# EAGLE board ps2x2 (EAGLE 7.5.0)
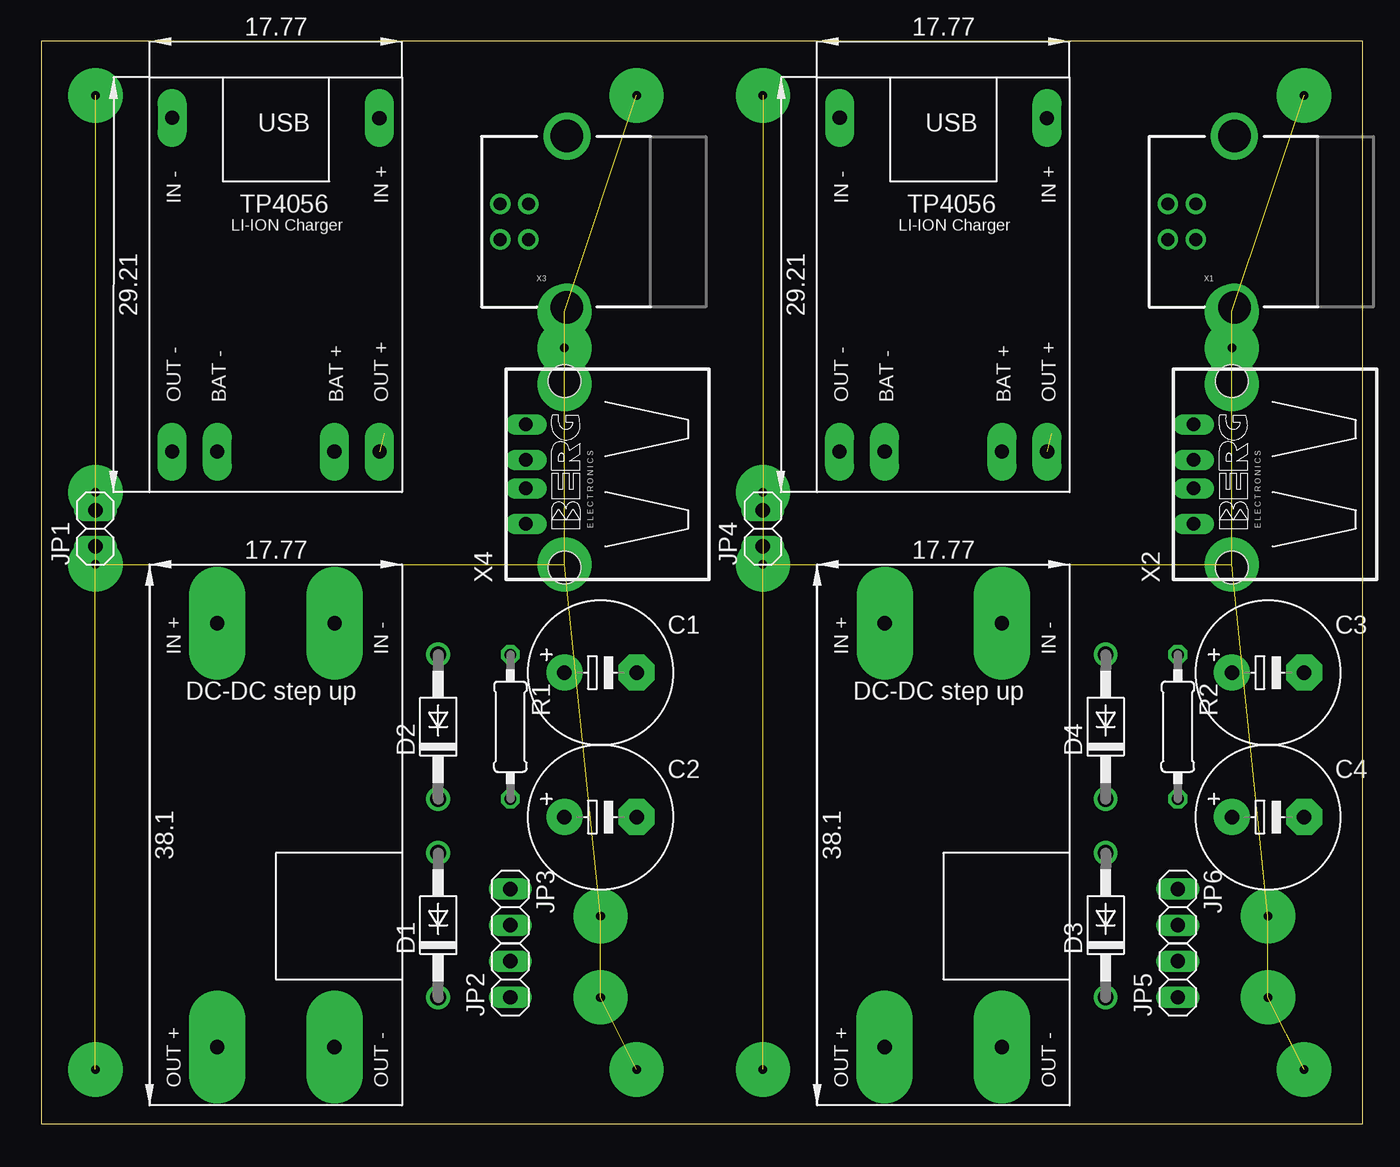
[diagram p0: board, top side]
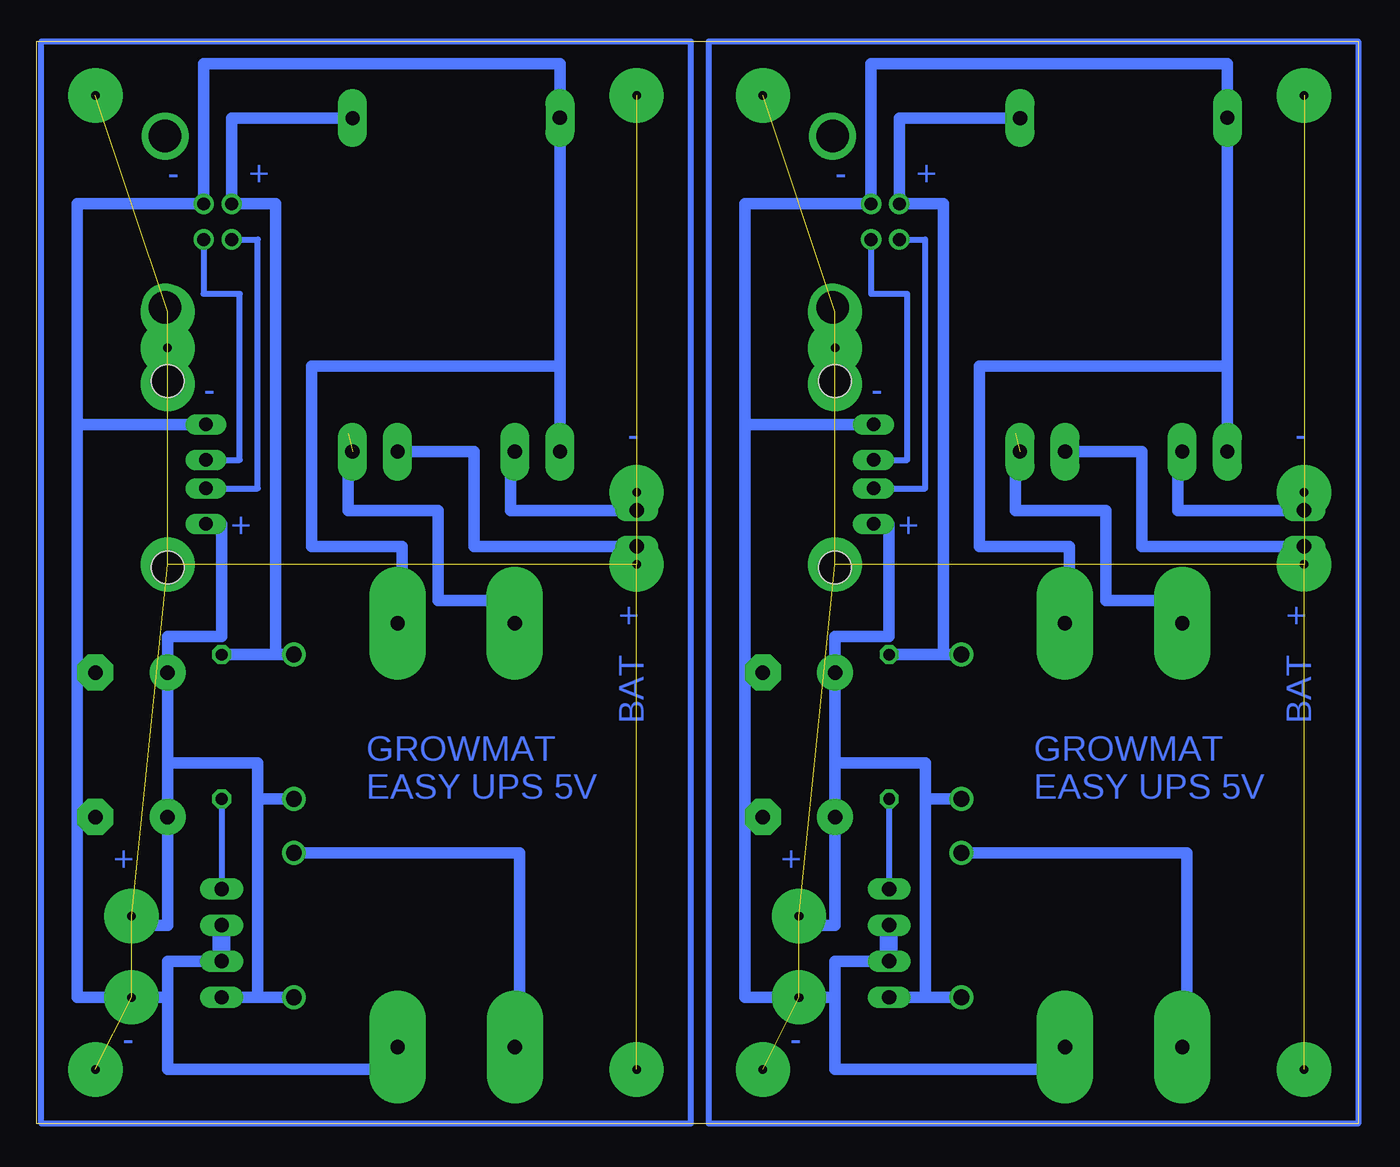
[diagram p1: board, bottom side, seen from below]

Size 93.02 x 76.19 mm. Coordinates in mm from the lower left corner, seen from the top.
Outline: 0,0 93.02,0 93.02,76.19 0,76.19 0,0
Copper layers (1*16): Top 0.035mm / dielectric 1.5mm / Bottom 0.035mm
Design rules "default": minimum track width 10mil, minimum drill 24mil, track to track 8mil, track to pad 8mil, pad to pad 8mil, via to via 8mil, smd to smd 8mil, copper to edge 40mil, drill to drill 8mil, minimum pad ring 10mil, minimum via ring 8mil, stop-mask expansion 4mil, vias tented up to drill 0mil, thermal gap 10mil

## Footprints (pad centres in the part's own frame; a part is rotated, then mirrored left to right if it is on the bottom)
E5-10,5 = drill 1.016 pad 2.54: + -2.54,0 | drill 1.016 pad 2.54 octagon: - 2.54,0
DO41-10 = drill 1.118: A 5.08,0; C -5.08,0
1X02 = drill 1.016 long: 1 -1.27,0; 2 1.27,0
0207/10 = drill 0.813 octagon: 1 -5.08,0; 2 5.08,0
TP4056 = drill 1 pad 2.032 long: BAT+ 4.128,-13.652; BAT- -4.128,-13.652; IN+ 7.295,9.835; IN- -7.295,9.85; OUT+ 7.303,-13.652; OUT- -7.303,-13.652
DC-DC_STEPUP = drill 1 pad 3.962 long: IN+ -4.12,8.565; IN- 4.135,8.565; OUT+ -4.128,-21.273; OUT- 4.128,-21.273
USB-B-PTH = drill 0.914: D+ 0,1.25; D- 1.981,1.25; GND 0,-1.25; VBUS 1.981,-1.25 | drill 2.286: P$1 -2.718,-6.02; P$2 -2.718,6.02
PN87520 = drill 0.95 long: 1 -3.5,2.71; 2 -1,2.71; 3 1,2.71; 4 3.5,2.71 | hole 2.3: -6.57,0; 6.57,0

## Placement (x,y rotation side)
C1  [E5-10,5]  39.37,31.75 0 top
C2  [E5-10,5]  39.37,21.59 0 top
C3  [E5-10,5]  86.36,31.75 0 top
C4  [E5-10,5]  86.36,21.59 0 top
D1  1N4004  [DO41-10]  27.94,13.97 90 top
D2  1N4004  [DO41-10]  27.94,27.94 90 top
D3  1N4004  [DO41-10]  74.93,13.97 90 top
D4  1N4004  [DO41-10]  74.93,27.94 90 top
JP1  [1X02]  3.81,41.91 90 top
JP2  [1X02]  33.02,10.16 90 top
JP3  [1X02]  33.02,15.24 270 top
JP4  [1X02]  50.8,41.91 90 top
JP5  [1X02]  80.01,10.16 90 top
JP6  [1X02]  80.01,15.24 270 top
R1  [0207/10]  33.02,27.94 270 top
R2  [0207/10]  80.01,27.94 270 top
U$1  TP4056  [TP4056]  16.51,60.96 0 top
U$2  TP4056  [TP4056]  63.5,60.96 0 top
U$3  DC-DC_STEPUP  [DC-DC_STEPUP]  16.51,26.67 0 top
U$4  DC-DC_STEPUP  [DC-DC_STEPUP]  63.5,26.67 0 top
X1  USBPTH  [USB-B-PTH]  81.28,63.5 180 top
X2  [PN87520]  83.82,45.72 90 top
X3  USBPTH  [USB-B-PTH]  34.29,63.5 180 top
X4  [PN87520]  36.83,45.72 90 top

## Library data of the parts
C1-C4 R1 R2 = resistor
D1-D4 = diode
JP1-JP6 = pinhead
U$1 U$2 = TP4056 charging module with protection
U$3 U$4 = DC-DC step up 2
X1 X3 = usb
X2 X4 = con-berg; OC_FARNELL: unknown; OC_NEWARK: unknown

## Nets
N$1: D2.A R1.1 U$1.IN+ X3.VBUS
N$2: U$1.OUT+ U$3.IN+
N$3: C1.- C2.- JP2.2 JP3.2 U$1.IN- U$1.OUT- U$3.IN- U$3.OUT- X3.GND X4.4
N$6: JP1.1 U$1.BAT+
N$7: JP1.2 U$1.BAT-
N$8: D1.A U$3.OUT+
N$9: C1.+ C2.+ D1.C D2.C JP2.1 X4.1
N$10: D4.A R2.1 U$2.IN+ X1.VBUS
N$11: U$2.OUT+ U$4.IN+
N$12: JP3.1 R1.2
N$13: X3.D+ X4.3
N$14: X3.D- X4.2
N$15: JP4.1 U$2.BAT+
N$16: JP4.2 U$2.BAT-
N$17: D3.A U$4.OUT+
N$18: C3.+ C4.+ D3.C D4.C JP5.1 X2.1
N$19: JP6.1 R2.2
N$20: X1.D+ X2.3
N$21: X1.D- X2.2
N$22: C3.- C4.- JP5.2 JP6.2 U$2.IN- U$2.OUT- U$4.IN- U$4.OUT- X1.GND X2.4

## Tracks (layer width: path | path; a pad name or v marks a point on that pad's centre or on a via)
N$1
  Bottom 0.406: 32.31,64.77 X3.VBUS
  Bottom 0.813: U$1.IN+ 32.31,70.8 32.31,64.77 29.21,64.77 29.21,33.02 | R1.1 29.21,33.02 | 29.21,33.02 D2.A
N$2  (1 unrouted)
  Bottom 0.406: 12.39,36.83 U$3.IN+
  Bottom 0.813: 24.13,48.58 24.13,43.18 17.78,43.18 17.78,36.83 12.39,36.83
N$3
  Bottom 0.406: 34.29,64.77 X3.GND | U$1.OUT- 9.21,48.58 | U$3.IN- 20.32,35.23 | U$3.OUT- 20.32,5.4 20.32,3.81
  Bottom 0.813: X4.4 43.18,49.22 | 43.18,49.22 43.18,64.77 34.29,64.77 34.29,74.62 9.21,74.62 U$1.IN- 9.21,53.34 | 9.21,48.58 9.21,53.34 | 20.32,35.23 20.32,40.64 26.67,40.64 26.67,53.34 9.21,53.34 | 20.32,3.81 36.83,3.81 36.83,8.89 | 36.83,8.89 36.83,11.43 JP2.2 | C2.- 43.18,21.59 | 43.18,21.59 43.18,8.89 36.83,8.89 | 43.18,49.22 43.18,31.75 | C1.- 43.18,31.75 | 43.18,31.75 43.18,21.59
  Bottom 1.27: JP2.2 JP3.2
N$4
  Bottom 0.406: 45.72,0 45.72,76.2 0,76.2 0,0 45.72,0
N$5  (via drill 0.6 pad 3.81)  (11 unrouted)
  other vias: 3.81,72.39 3.81,3.81 41.91,72.39 41.91,3.81 36.83,52.07 36.83,39.37 36.83,54.61 36.83,57.15 3.81,44.45 3.81,39.37 39.37,8.89 39.37,14.61
N$6
  Bottom 0.813: U$1.BAT+ 15.24,47.31 15.24,40.64 JP1.1
N$7
  Bottom 0.406: U$1.BAT- 12.7,48.58
  Bottom 0.813: 12.7,48.58 12.7,43.18 JP1.2
N$8
  Bottom 0.406: U$3.OUT+ 12.07,6.03
  Bottom 0.813: 12.07,6.03 12.07,19.05 D1.A
N$9
  Bottom 0.813: 30.48,22.86 30.48,8.89 | 36.83,25.4 30.48,25.4 30.48,22.86 | X4.1 33.02,42.22 33.02,34.29 36.83,34.29 C1.+ 36.83,25.4 | D2.C 30.48,22.86 | D1.C 30.48,8.89 | 30.48,8.89 JP2.1 | 36.83,25.4 C2.+ 36.83,13.97 39.37,13.97
N$10
  Bottom 0.406: 79.3,64.77 X1.VBUS
  Bottom 0.813: U$2.IN+ 79.3,70.8 79.3,64.77 76.2,64.77 76.2,33.02 | R2.1 76.2,33.02 | 76.2,33.02 D4.A
N$11  (1 unrouted)
  Bottom 0.406: 59.38,36.83 U$4.IN+
  Bottom 0.813: 71.12,48.58 71.12,43.18 64.77,43.18 64.77,36.83 59.38,36.83
N$12
  Bottom 0.406: R1.2 JP3.1
N$13
  Bottom 0.406: X3.D+ 34.29,58.42 31.75,58.42 31.75,46.72 X4.3
N$14
  Bottom 0.406: X3.D- 30.48,62.25 30.48,44.72 X4.2
N$15
  Bottom 0.813: U$2.BAT+ 62.23,47.31 62.23,40.64 JP4.1
N$16
  Bottom 0.406: U$2.BAT- 59.69,48.58
  Bottom 0.813: 59.69,48.58 59.69,43.18 JP4.2
N$17
  Bottom 0.406: U$4.OUT+ 59.05,6.03
  Bottom 0.813: 59.05,6.03 59.05,19.05 D3.A
N$18
  Bottom 0.813: 77.47,22.86 77.47,8.89 | 83.82,25.4 77.47,25.4 77.47,22.86 | X2.1 80.01,42.22 80.01,34.29 83.82,34.29 C3.+ 83.82,25.4 | D4.C 77.47,22.86 | D3.C 77.47,8.89 | 77.47,8.89 JP5.1 | 83.82,25.4 C4.+ 83.82,13.97 86.36,13.97
N$19
  Bottom 0.406: R2.2 JP6.1
N$20
  Bottom 0.406: X1.D+ 81.28,58.42 78.74,58.42 78.74,46.72 X2.3
N$21
  Bottom 0.406: X1.D- 77.47,62.25 77.47,44.72 X2.2
N$22
  Bottom 0.406: 81.28,64.77 X1.GND | U$2.OUT- 56.2,48.58 | U$4.IN- 67.31,35.23 | U$4.OUT- 67.31,5.4 67.31,3.81
  Bottom 0.813: X2.4 90.17,49.22 | 90.17,49.22 90.17,64.77 81.28,64.77 81.28,74.62 56.2,74.62 U$2.IN- 56.2,53.34 | 56.2,48.58 56.2,53.34 | 67.31,35.23 67.31,40.64 73.66,40.64 73.66,53.34 56.2,53.34 | 67.31,3.81 83.82,3.81 83.82,8.89 | 83.82,8.89 83.82,11.43 JP5.2 | C4.- 90.17,21.59 | 90.17,21.59 90.17,8.89 83.82,8.89 | 90.17,49.22 90.17,31.75 | C3.- 90.17,31.75 | 90.17,31.75 90.17,21.59
  Bottom 1.27: JP5.2 JP6.2
N$23
  Bottom 0.406: 92.71,0 92.71,76.2 46.99,76.2 46.99,0 92.71,0
N$24  (via drill 0.6 pad 3.81)  (11 unrouted)
  other vias: 50.8,72.39 50.8,3.81 88.9,72.39 88.9,3.81 83.82,52.07 83.82,39.37 83.82,54.61 83.82,57.15 50.8,44.45 50.8,39.37 86.36,8.89 86.36,14.61

## Text on the board
Bottom: + | - | + | - | - | - | - | - | + | + | + | + | BAT | BAT | GROWMAT / EASY UPS 5V | GROWMAT / EASY UPS 5V | + | + | - | -